# EAGLE board SinclairScientificCover (EAGLE 9.2.2)
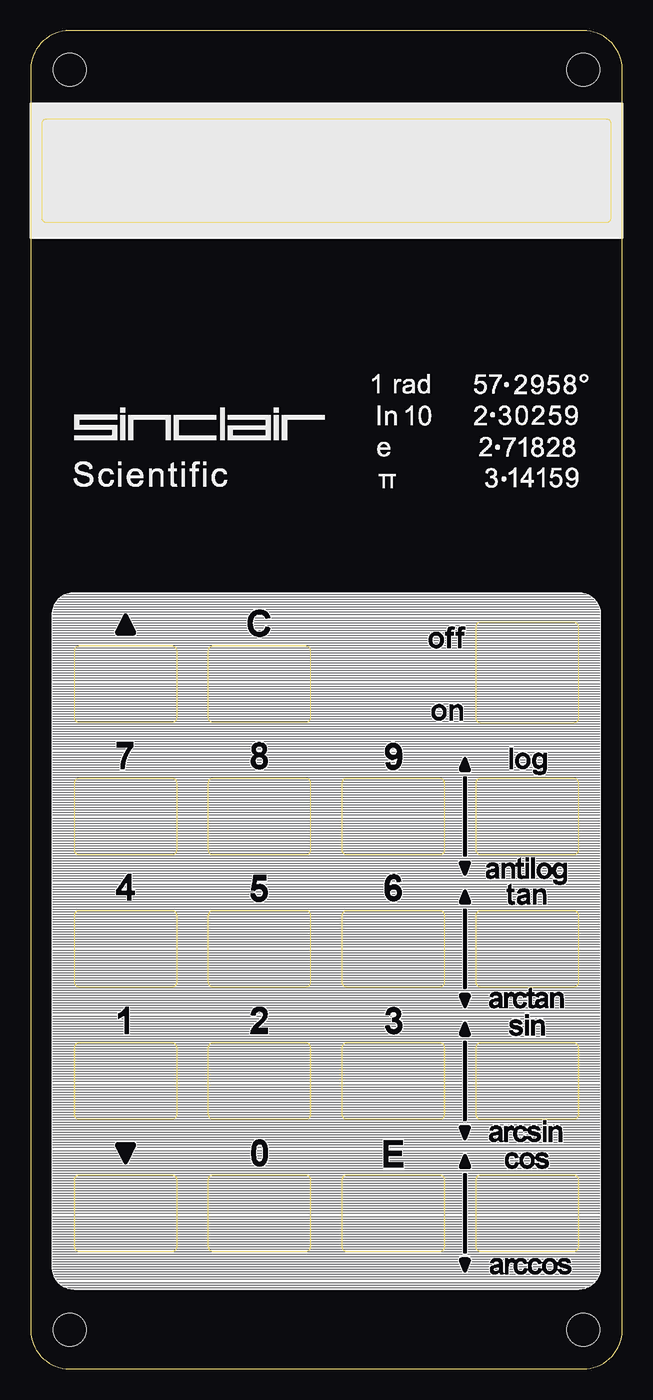
[diagram p0: board, top side]
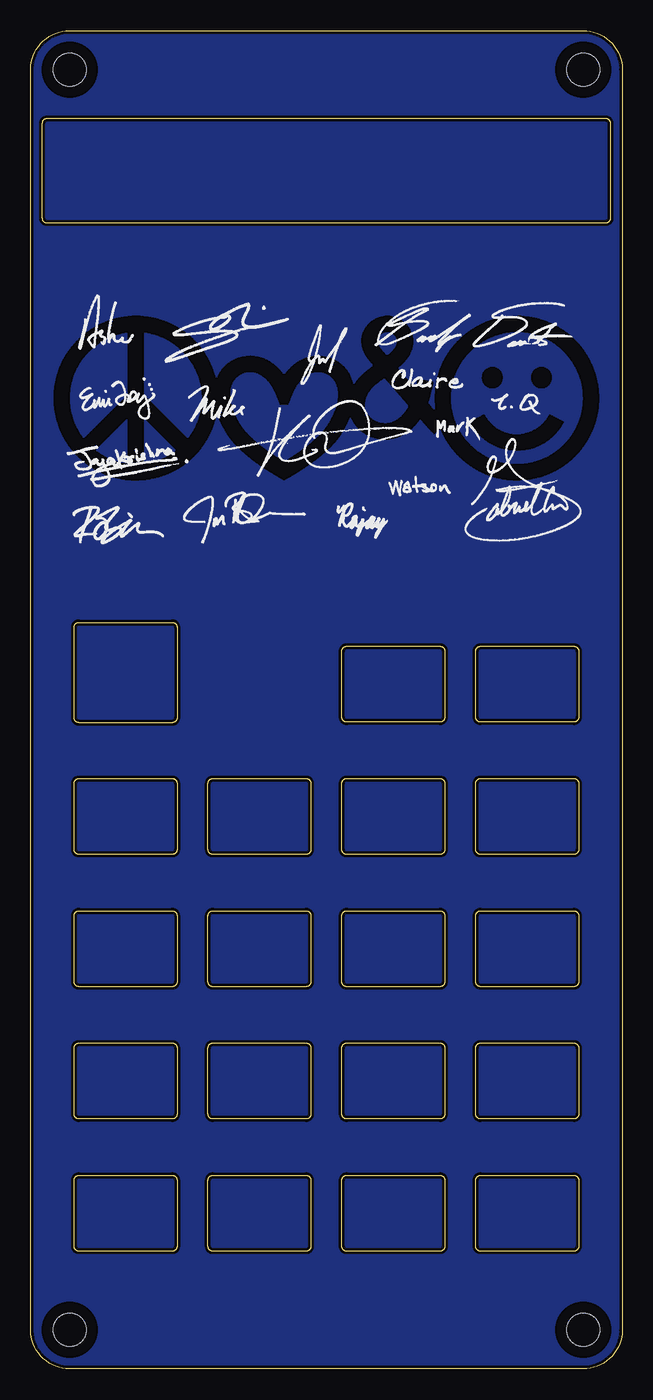
[diagram p1: board, bottom side, seen from below]

Size 48.26 x 109.22 mm. Coordinates in mm from the lower left corner, seen from the top.
Outline: 3.17,0 45.09,0 arc90 48.26,3.17 48.26,106.05 arc90 45.09,109.22 3.17,109.22 arc90 0,106.05 0,3.17 arc90 3.17,0
Outline: 46.93,93.54 1.33,93.54 arc-90 0.94,93.94 0.94,101.64 arc-90 1.33,102.04 46.93,102.04 arc-90 47.34,101.64 47.34,93.94 arc-90 46.93,93.54
Copper layers (1*16): Top 0.035mm / dielectric 1.93mm / Bottom 0.035mm
Design rules "default *": minimum track width 10mil, minimum drill 12mil, track to track 7mil, track to pad 7mil, pad to pad 7mil, via to via 7mil, smd to smd 7mil, copper to edge 10mil, drill to drill 10mil, minimum pad ring 12mil, minimum via ring 8mil, stop-mask expansion 2mil, vias tented up to drill 20mil, thermal gap 10mil
Net classes: 1 usb_data: width 0.203 mm, drill 0.305 mm, clearance 0.254 mm

## Footprints (pad centres in the part's own frame; a part is rotated, then mirrored left to right if it is on the bottom)
HOLE_3-48_NO-STOP = hole 2.667: 0,0

## Placement (x,y rotation side)
E$1  [HOLE-1S_CAP]  7.75,12.7 0 top
E$2  [HOLE-1S_CAP]  18.67,12.7 0 top
E$3  [HOLE-1S_CAP]  29.59,12.7 0 top
E$4  [HOLE-1S_CAP]  40.51,12.7 0 top
E$5  [HOLE-1S_CAP]  40.51,23.5 0 top
E$6  [HOLE-1S_CAP]  29.59,23.5 0 top
E$7  [HOLE-1S_CAP]  18.67,23.5 0 top
E$8  [HOLE-1S_CAP]  7.75,23.5 0 top
E$9  [HOLE-1S_CAP]  7.75,34.29 0 top
E$10  [HOLE-1S_CAP]  18.67,34.29 0 top
E$11  [HOLE-1S_CAP]  29.59,34.29 0 top
E$12  [HOLE-1S_CAP]  40.51,34.29 0 top
E$13  [HOLE-1S_CAP]  40.51,45.09 0 top
E$14  [HOLE-1S_CAP]  29.59,45.09 0 top
E$15  [HOLE-1S_CAP]  18.67,45.09 0 top
E$16  [HOLE-1S_CAP]  7.75,45.09 0 top
E$17  [HOLE-1S_CAP]  7.75,55.88 0 top
E$18  [HOLE-1S_CAP]  18.67,55.88 0 top
E$19  [SILK_BTN_C]  18.67,60.86 0 top
E$20  [HOLE-PWR]  40.51,56.83 0 top
E$21  [SILK_BTN_UP]  7.75,60.76 0 top
E$22  [SILK_BTN_7]  7.77,50.11 0 top
E$23  [SILK_BTN_8]  18.67,50.11 0 top
E$24  [SILK_BTN_9]  29.59,50.19 0 top
E$25  [SILK_BTN_4]  7.72,39.17 0 top
E$26  [SILK_BTN_5]  18.67,39.29 0 top
E$27  [SILK_BTN_6]  29.59,39.29 0 top
E$28  [SILK_BTN_3]  29.59,28.58 0 top
E$29  [SILK_BTN_2]  18.67,28.47 0 top
E$30  [SILK_BTN_1]  7.75,28.35 0 top
E$31  [SILK_BTN_0]  18.67,17.65 0 top
E$33  [SILK_BTN_E]  29.59,17.65 0 top
E$34  [SILK_BTN_COS]  40.51,17.02 0 top
E$35  [SILK_BTN_ARCCOS]  40.51,8.38 0 top
E$36  [SILK_BTN_ARCSIN]  40.51,19.23 0 top
E$37  [SILK_BTN_SIN]  40.51,27.94 0 top
E$38  [SILK_BTN_ARCTAN]  40.51,30.1 0 top
E$39  [SILK_BTN_TAN]  40.46,38.61 0 top
E$40  [SILK_BTN_ANTILOG]  40.51,40.77 0 top
E$41  [SILK_BTN_LOG]  40.51,49.61 0 top
E$42  [SILK_BTN_ON]  34.04,53.59 0 top
E$43  [SILK_BTN_OFF]  34.04,59.56 0 top
E$44  [SILK_BTN_FUNC_ARROWS]  35.43,45.09 0 top
E$45  [SILK_BTN_FUNC_ARROWS]  35.43,34.29 180 top
E$46  [SILK_BTN_FUNC_ARROWS]  35.43,23.5 0 top
E$47  [SILK_BTN_FUNC_ARROWS]  35.43,12.7 180 top
E$48  [LOGO_PLH_1750]  24.13,79.25 0 bottom
E$49  [SILK_REF_TEXT]  23.75,76.2 0 top
E$50  [SILK_SINCLAIR_LOGO]  3.56,76.84 0 top
E$51  [SILK_SIGNATURES]  23.75,77.47 0 bottom
E$52  [SILK_BTN_UP]  7.75,17.6 180 top
U$14  [HOLE_3-48_NO-STOP]  3.17,106.05 0 top
U$23  [HOLE_3-48_NO-STOP]  45.09,106.05 0 top
U$26  [HOLE_3-48_NO-STOP]  45.09,3.17 0 top
U$27  [HOLE_3-48_NO-STOP]  3.17,3.17 0 top

## Library data of the parts
E$1-E$31 E$33-E$52 U$14 U$23 U$26 U$27 = SinclairScientific

## Tracks (layer width: path | path; a pad name or v marks a point on that pad's centre or on a via)
COPPER
  pour Bottom: 3.12,109.35 45.11,109.35 arc-90 48.39,106.07 48.39,3.17 arc-90 45.09,-0.13 3.17,-0.13 arc-90 -0.13,3.17 -0.13,106.1 arc-90

## Text on the board
Reference: ^ | C | 7 | 8 | 9 | log | antilog | 4 | 5 | 6 | tan | arctan | 1 | 2 | 3 | sin | arcsin | ^ | 0 | E | cos | arccos